# EAGLE board Wheel Speed Sensor rev1 (EAGLE 9.5.0)
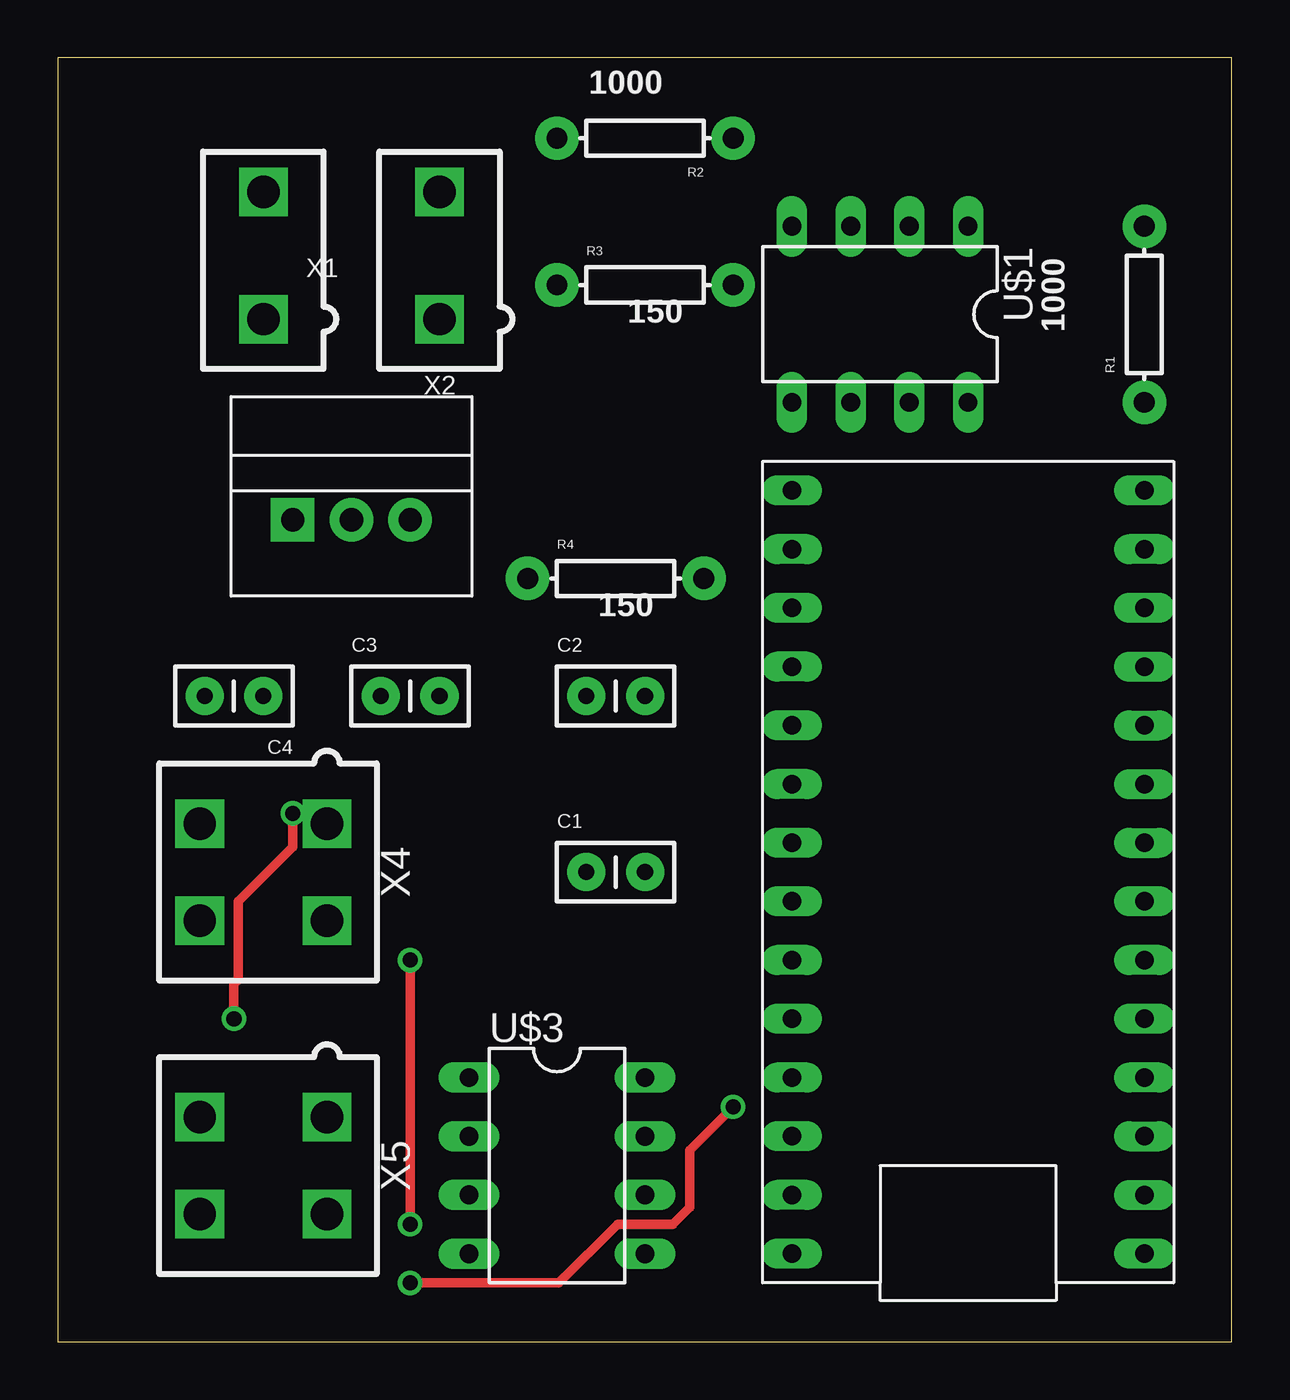
[diagram p0: board, top side]
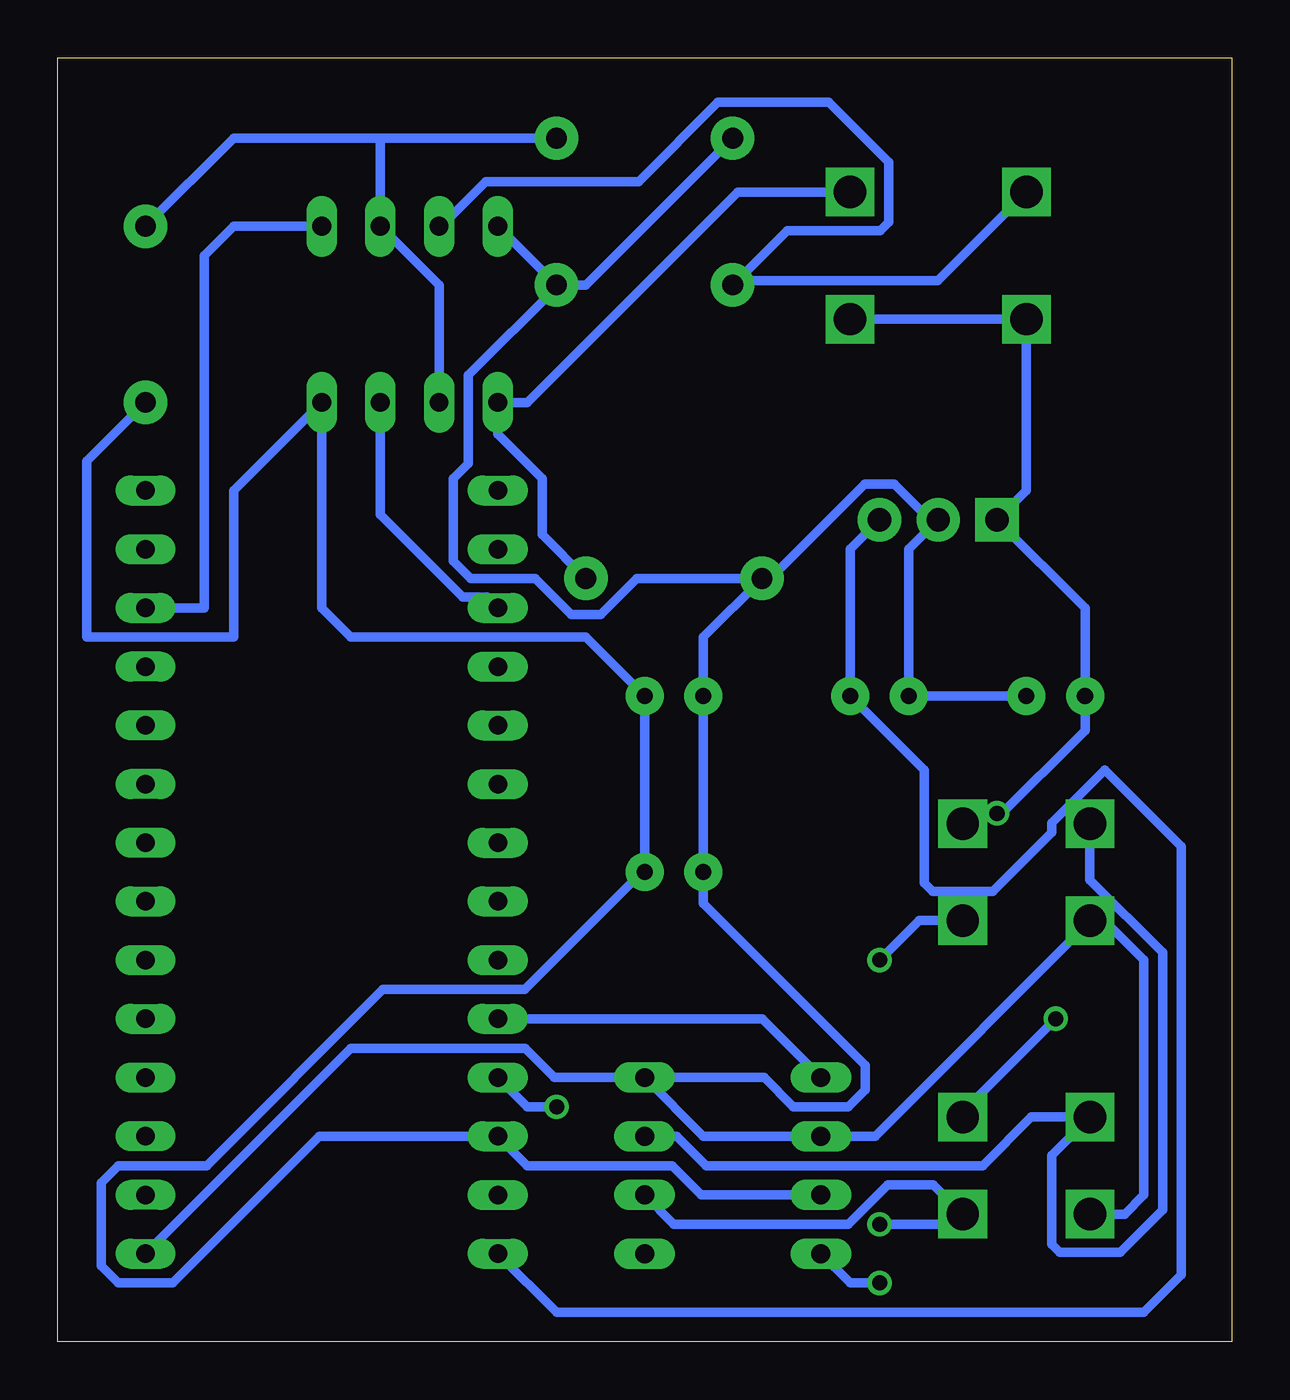
[diagram p1: board, bottom side, seen from below]

Size 50.78 x 55.55 mm. Coordinates in mm from the lower left corner, seen from the top.
Outline: 0,0 50.78,0 50.78,55.55 0,55.55 0,0
Copper layers (1*16): Top 0.035mm / dielectric 1.5mm / Bottom 0.035mm
Design rules "default *": minimum track width 16mil, minimum drill 0.35mm, track to track 16mil, track to pad 16mil, pad to pad 16mil, via to via 16mil, smd to smd 16mil, copper to edge 40mil, drill to drill 6mil, minimum pad ring 10mil, minimum via ring 8mil, stop-mask expansion 4mil, vias tented up to drill 0mil, thermal gap 10mil

## Footprints (pad centres in the part's own frame; a part is rotated, then mirrored left to right if it is on the bottom)
CAP-PTH-SMALLEZ = drill 0.7 pad 1.651: 1 0,0; 2 2.54,0
AXIAL-0.3 = drill 0.9 pad 1.88: P$1 -3.81,0; P$2 3.81,0
DIL08 = drill 0.813 long: 1 -3.81,-3.81; 2 -1.27,-3.81; 3 1.27,-3.81; 4 3.81,-3.81; 5 3.81,3.81; 6 1.27,3.81; 7 -1.27,3.81; 8 -3.81,3.81
TEENSY_3.2_SIMPLE = drill 0.8 long: 3.3V 16.51,29.21; A0 16.51,3.81; A1 16.51,6.35; A2 16.51,8.89; A3 16.51,11.43; A4 16.51,13.97; A5 16.51,16.51; A6 16.51,19.05; A7 16.51,21.59; A8 16.51,24.13; A9 16.51,26.67; AGND 16.51,31.75; D0(RX1) 1.27,31.75; D1(TX1) 1.27,29.21; D2 1.27,26.67; D3(CANTX) 1.27,24.13; D4(CANRX) 1.27,21.59; D5 1.27,19.05; D6 1.27,16.51; D7(RX3) 1.27,13.97; D8(TX3) 1.27,11.43; D9(RX2) 1.27,8.89; D10(TX2) 1.27,6.35; D11 1.27,3.81; D12 1.27,1.27; D13 16.51,1.27; GND 1.27,34.29; VIN 16.51,34.29
OKI-78SR = drill 1 pad 1.88 square: 1 -2.54,0 | drill 1 pad 1.88: 2 0,0; 3 2.54,0
MINIFIT_5566-2 = drill 1.4 square: 1 0,-2.75; 2 0,2.75
MINIFIT_5566-4 = drill 1.4 square: 1 2.1,-2.75; 2 -2.1,-2.75; 3 2.1,2.75; 4 -2.1,2.75

## Placement (x,y rotation side)
C1  1uF  [CAP-PTH-SMALLEZ]  22.86,20.32 0 top
C2  1uF  [CAP-PTH-SMALLEZ]  22.86,27.94 0 top
C3  [CAP-PTH-SMALLEZ]  13.97,27.94 0 top
C4  [CAP-PTH-SMALLEZ]  8.89,27.94 180 top
R1  1000  [AXIAL-0.3]  46.99,44.45 90 top
R2  1000  [AXIAL-0.3]  25.4,52.07 180 top
R3  150  [AXIAL-0.3]  25.4,45.72 0 top
R4  150  [AXIAL-0.3]  24.13,33.02 0 top
U$1  MCP6002PDIP  [DIL08]  35.56,44.45 180 top
U$2  TEENSY_3.2_SIMPLE  [TEENSY_3.2_SIMPLE]  48.26,38.1 180 top
U$3  MCP2551DIL  [DIL08]  21.59,7.62 270 top
U$4  OKI-78SR-5  [OKI-78SR]  12.7,35.56 0 top
X1  Sensor 1  [MINIFIT_5566-2]  8.89,46.99 0 top
X2  Sensor 2  [MINIFIT_5566-2]  16.51,46.99 0 top
X4  CONNECTOR-4  [MINIFIT_5566-4]  8.89,20.32 90 top
X5  CONNECTOR-4  [MINIFIT_5566-4]  8.89,7.62 90 top

## Library data of the parts
C1-C4 R1-R4 U$1-U$4 = HyTechDevices
X1 X2 = HyTechDevices; OC_FARNELL: 1822072; OC_NEWARK: unknown
X4 X5 = HyTechDevices; OC_FARNELL: unknown; OC_NEWARK: unknown

## Nets
3.3V: C1.2 C2.2 R1.P$1 U$1.8 U$2.3.3V U$3.3
5V: C3.2 U$2.VIN U$4.3
CANH: U$3.7 X4.3 X5.3
GND: C1.1 C2.1 C3.1 C4.1 R2.P$2 R3.P$2 R4.P$1 U$1.4 U$2.GND U$3.2 U$3.8 U$4.2 X4.4 X5.4
N$2: R1.P$2 R2.P$1 U$1.2 U$1.6
N$3: U$3.6 X4.2 X5.2
N$4: R3.P$1 U$1.3 X1.2
N$5: U$1.7 U$2.A1
N$6: U$1.1 U$2.D10(TX2)
N$8: R4.P$2 U$1.5 X2.2
RX: U$2.A9 U$3.4
TX: U$2.A8 U$3.1
VIN: C4.2 U$4.1 X1.1 X2.1 X4.1 X5.1

## Tracks (layer width: path | path; a pad name or v marks a point on that pad's centre or on a via)
3.3V
  Bottom 0.406: R1.P$1 49.53,38.1 49.53,30.48 43.18,30.48 43.18,36.83 U$1.8 39.37,31.75 38.1,30.48 27.94,30.48 C2.2 C1.2 25.5,20.32 30.59,15.23 36.72,15.23 44.34,7.61 48.17,7.61 48.91,6.87 48.91,3.29 48.17,2.55 45.81,2.55 39.47,8.89 U$2.3.3V 30.48,7.62 24.21,7.62 22.94,6.35 U$3.3
5V
  Bottom 0.406: U$4.3 16.51,34.29 C3.2 13.3,24.73 13.3,19.85 12.94,19.49 10.34,19.49 7.8,22.03 7.8,22.45 5.51,24.75 2.18,21.43 2.18,2.9 3.81,1.27 29.21,1.27 U$2.VIN
CANH
  Bottom 0.406: X4.3 6.14,19.99 3,16.85 3,5.7 4.84,3.86 7.44,3.86 7.8,4.22 7.8,8.06 X5.3 8.68,9.72 10.78,7.62 22.74,7.62 24.01,8.89 U$3.7
GND
  Bottom 0.406: C4.1 C3.1 13.97,34.29 U$4.2 13.05,35.56 14.6,37.11 15.88,37.11 19.97,33.02 R4.P$1 | R4.P$1 22.86,30.48 C2.1 C1.1 22.86,18.97 15.85,11.96 15.85,10.9 16.59,10.16 18.97,10.16 20.24,11.43 U$3.8 | X5.4 4.64,5.52 3.81,6.35 3.81,16.51 5.52,18.22 X4.4 6.14,18.18 15.43,8.89 U$3.2 22.86,8.89 U$3.8 | R2.P$2 27.94,45.72 R3.P$2 | R3.P$2 29.21,45.64 33.02,41.83 33.02,38 33.67,37.35 33.67,33.77 32.93,33.03 30.14,33.03 28.58,31.47 27.3,31.47 25.75,33.02 R4.P$1 | U$1.4 R3.P$2 | U$3.8 29.31,11.43 30.57,12.69 38.11,12.69 U$2.GND
N$2
  Bottom 0.406: R2.P$1 36.83,52.07 | 36.83,52.07 43.18,52.07 R1.P$2 | 36.83,52.07 U$1.2 34.29,45.72 U$1.6
N$3  (via drill 0.65)
  Top 0.406: v15.24,5.08 v15.24,16.51
  Bottom 0.406: U$3.6 24.13,5.08 16.59,5.08 14.88,6.79 12.91,6.79 X5.2 12.08,5.08 v15.24,5.08 | X4.2 13.53,18.22 v15.24,16.51
N$4
  Bottom 0.406: X1.2 12.73,45.9 21.41,45.9 R3.P$1 19.23,48.08 15.21,48.08 14.85,48.44 14.85,51.04 17.43,53.62 22.23,53.62 25.66,50.19 32.28,50.19 34.21,48.26 U$1.3
N$5
  Bottom 0.406: U$2.A1 32.21,32.21 33.26,32.21 36.83,35.78 U$1.7
N$6
  Bottom 0.406: U$1.1 43.18,48.26 44.45,46.99 44.45,31.75 U$2.D10(TX2)
N$8
  Bottom 0.406: R4.P$2 29.83,34.91 29.83,37.35 31.75,39.27 U$1.5 30.48,40.64 21.38,49.74 X2.2
RX  (via drill 0.65)
  Top 0.406: v29.21,10.16 27.33,8.28 27.33,5.82 26.59,5.08 24.21,5.08 21.67,2.54 v15.24,2.54
  Bottom 0.406: U$3.4 16.51,2.54 v15.24,2.54 | U$2.A9 30.48,10.16 v29.21,10.16
TX
  Bottom 0.406: U$3.1 20.32,13.97 U$2.A8
VIN  (via drill 0.65)
  Top 0.406: v7.62,13.97 7.62,15.47 7.8,15.65 7.8,19.05 10.16,21.41 v10.16,22.86
  Bottom 0.406: X2.1 X1.1 8.89,36.83 U$4.1 6.35,31.75 C4.2 6.35,26.44 10.16,22.63 v10.16,22.86 11.2,22.86 X4.1 | X5.1 11.64,9.95 v7.62,13.97